# Altium PCB PCB.001.PcbDoc
Units mm, origin at the board's own origin, x right, y up, seen from the top; angles counter-clockwise.
Board outline 30 x 37.25 mm, 2 copper layers (Top Layer, Bottom Layer), stack 1.271 mm thick; 33 components, 28 nets, 154 pads, 51 vias.
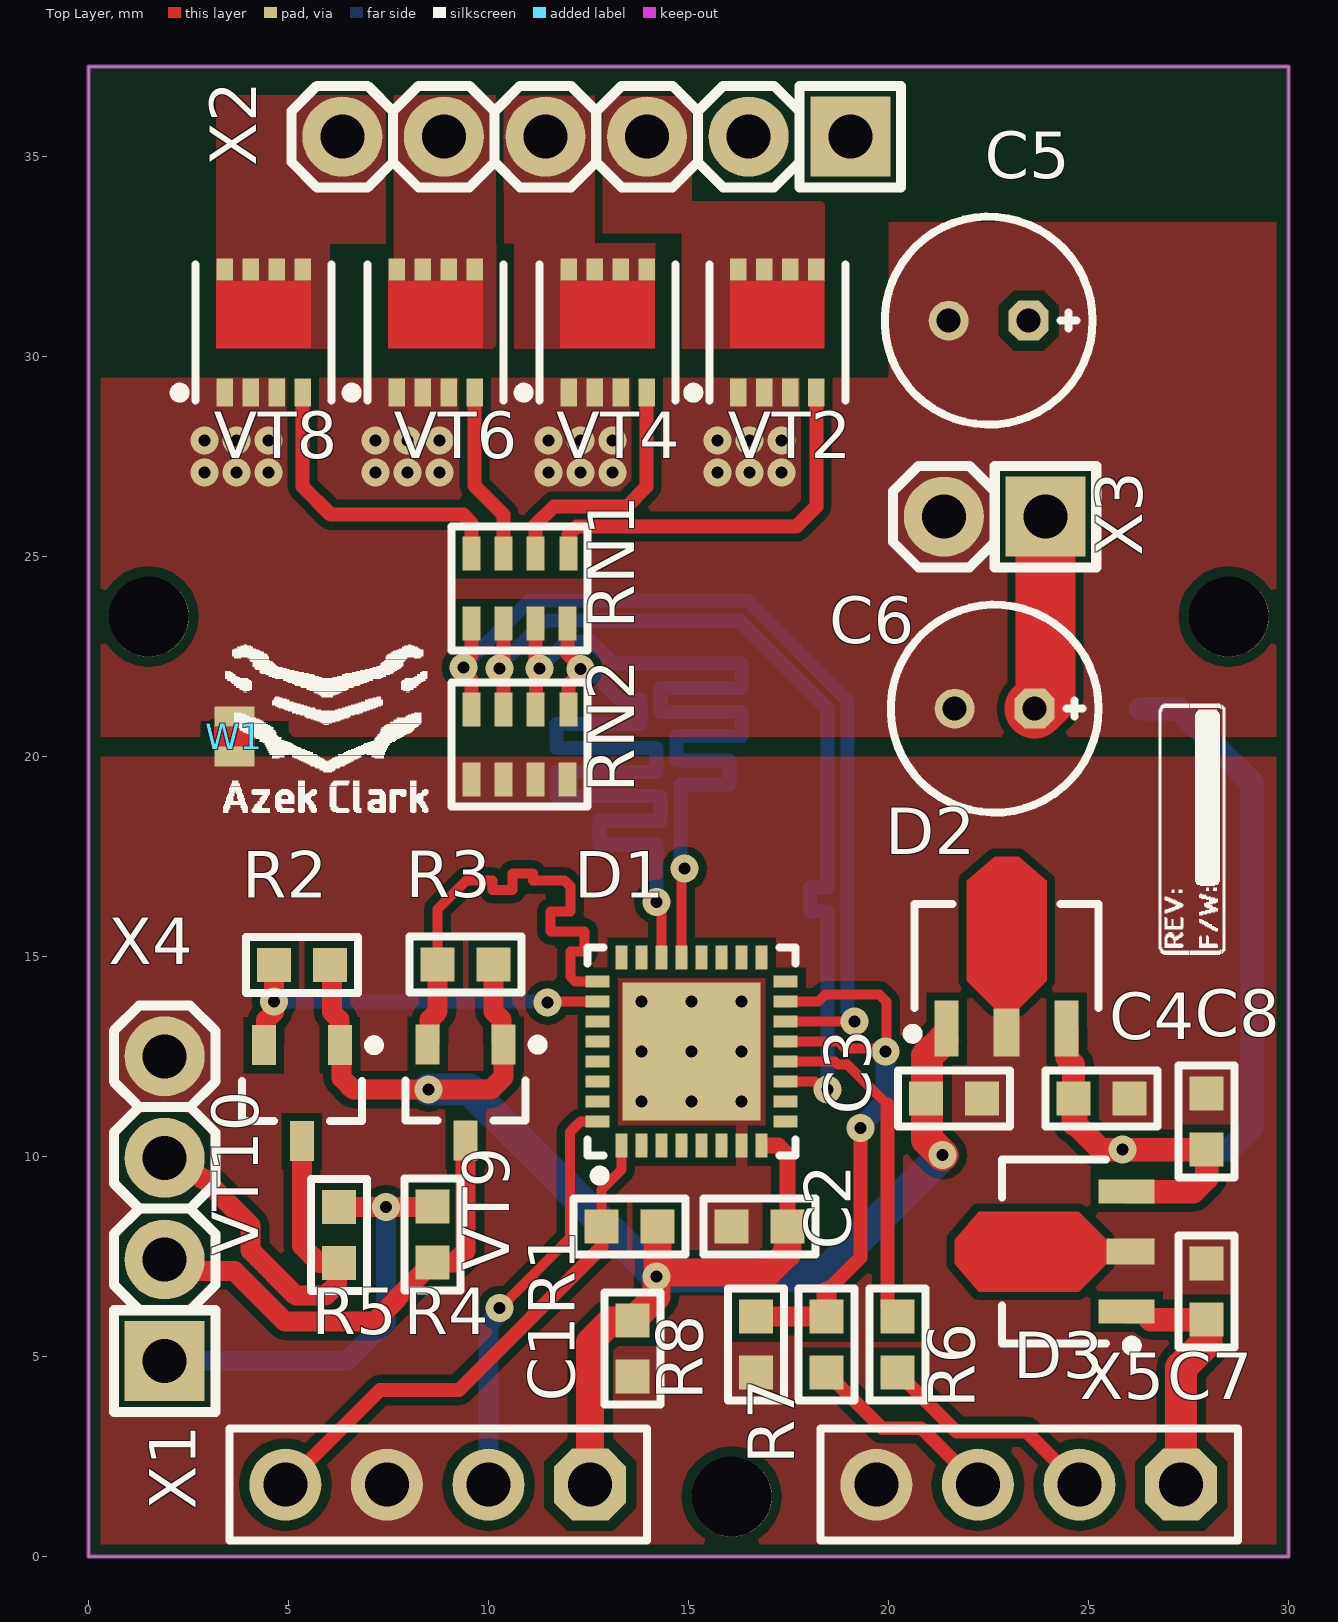
[diagram p0: Top Layer view]
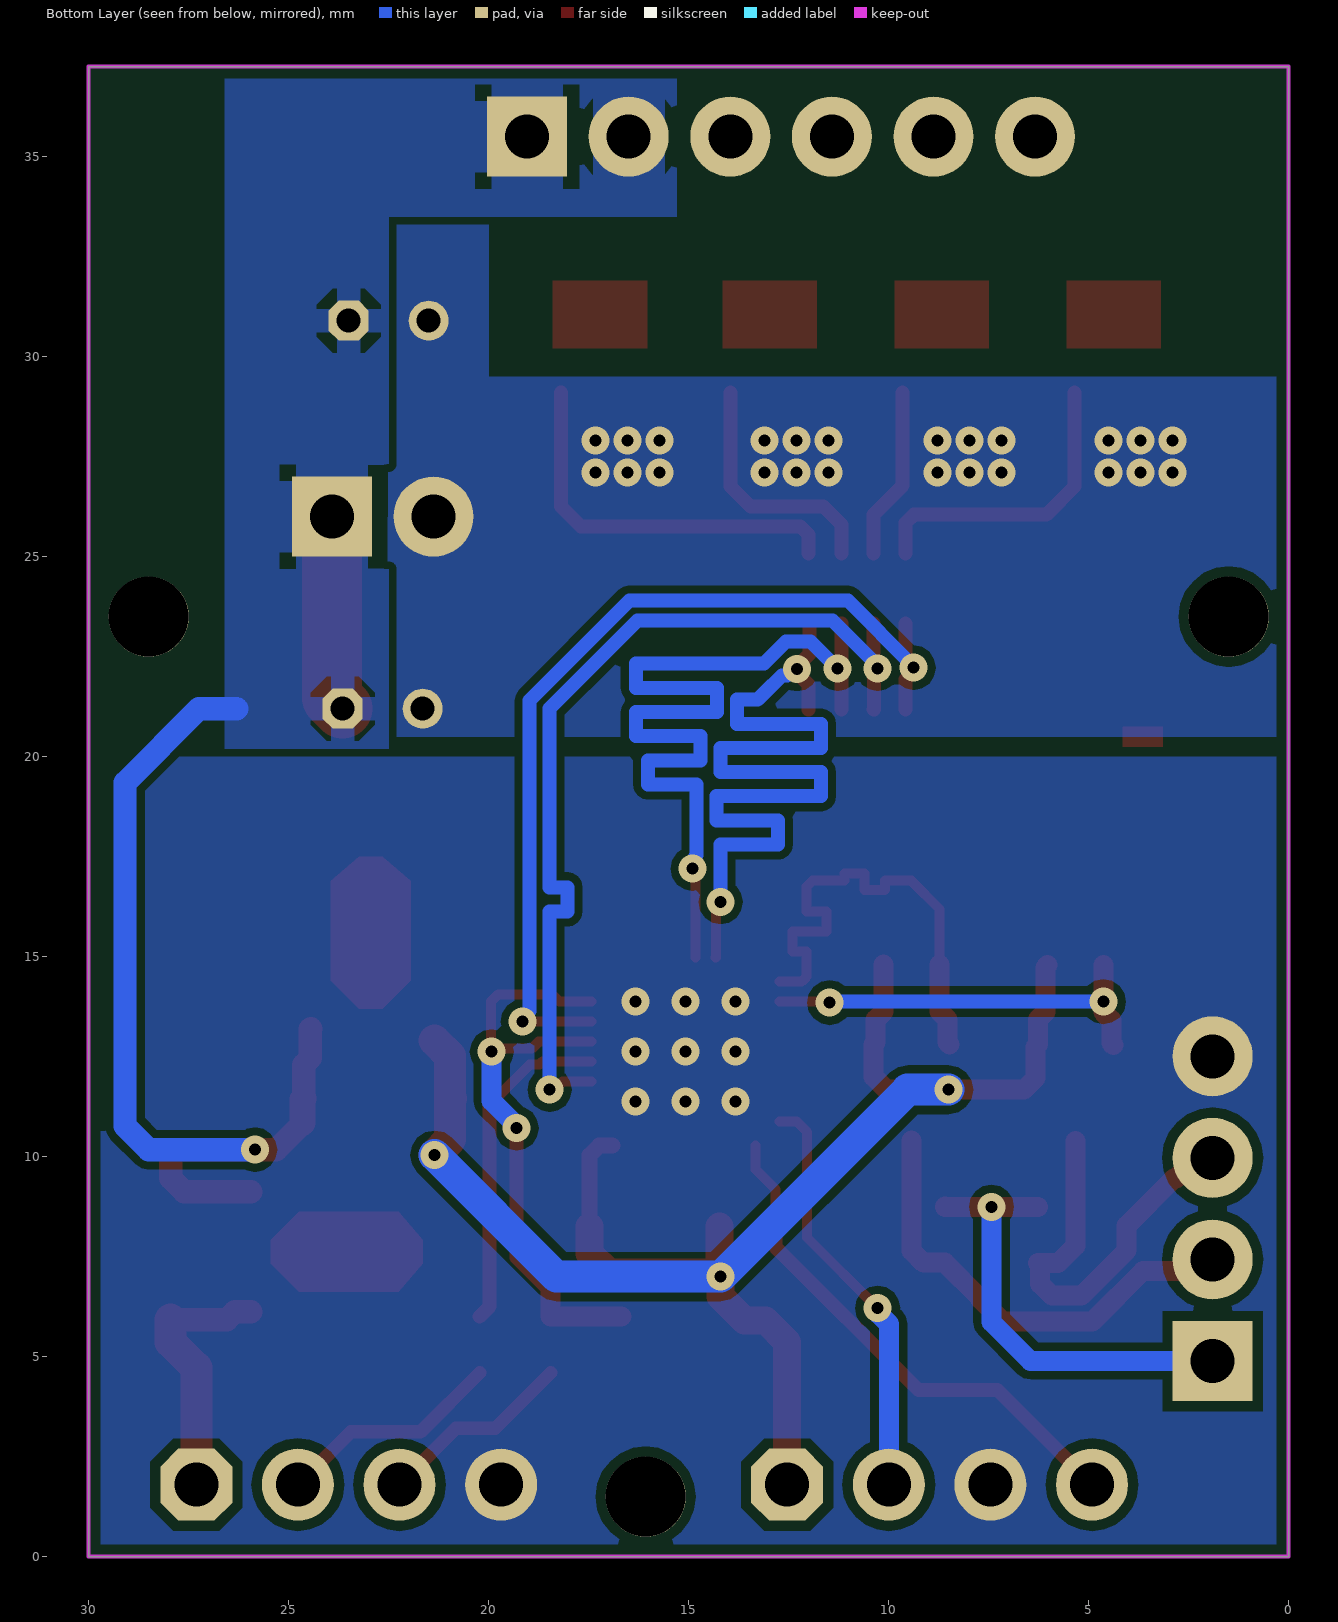
[diagram p1: Bottom Layer view, seen from below]
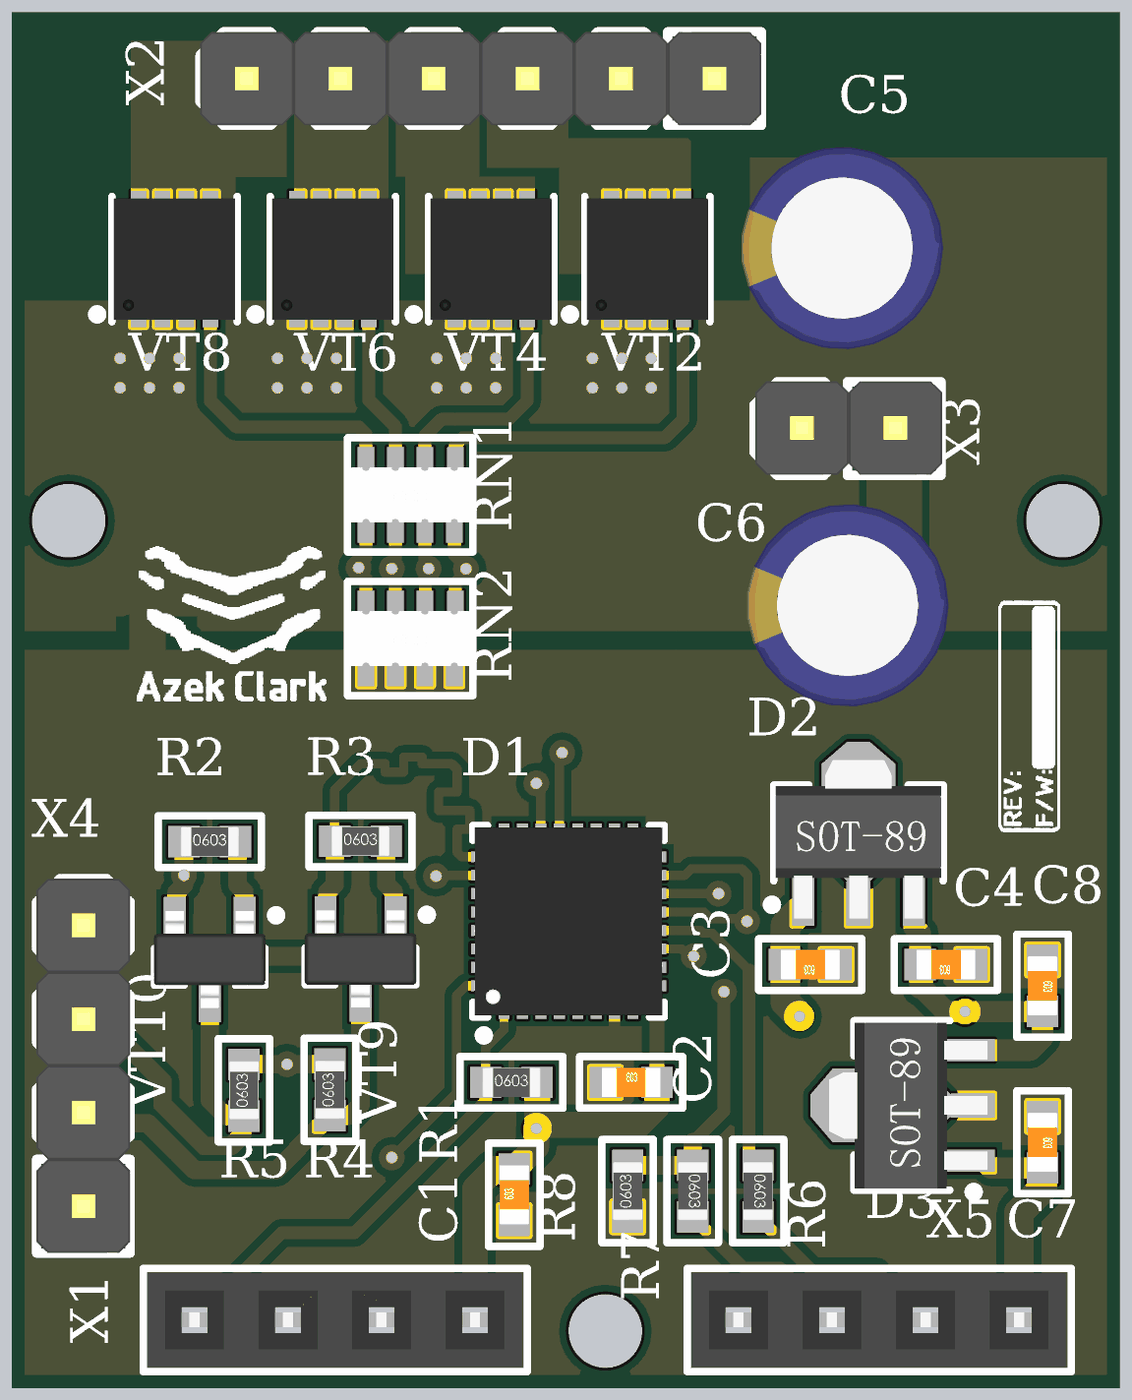
[diagram p2: 3D render of the assembled board from above, using the file's embedded part models]

## Layer stack, top to bottom
Top Solder: solder mask 0.0102, Solder Resist, Dk 3.5
Top Layer: signal copper 0.0356
Dielectric 1: dielectric 1.2, FR-4, Dk 4.8
Bottom Layer: signal copper 0.0356
Bottom Solder: solder mask 0.0102, Solder Resist, Dk 3.5

## Board outline
0,0 0,37.25 30,37.25 30,0

## Design rules (kind name [scope] priority, off if disabled: settings)
BoardOutlineClearance [All] p1: gap=0.3 ignorepadtopadclearanceinfootprint=FALSE
Clearance Clearance_1 [InNamedPolygon('12V_L02_P005')] p1: gap=0.2 ignorepadtopadclearanceinfootprint=FALSE except(0: Arc-Arc Arc-Track Arc-SMDPad Arc-THPad Arc-Via Arc-Fill Arc-Poly Arc-Region Arc-Text Arc-Hole Track-Track Track-SMDPad Track-THPad Track-Via Track-Fill Track-Poly Track-Region Track-Text Track-Hole SMDPad-Hole THPad-Hole Via-Hole Fill-Hole Poly-Hole Region-Hole Text-Hole)
Clearance Clearance_NPTH [All vs InPadClass('NPTH')] p2: gap=0.4 ignorepadtopadclearanceinfootprint=FALSE except(0: Arc-Hole Track-Hole SMDPad-Hole THPad-Hole Via-Hole Fill-Hole Poly-Hole Region-Hole Text-Hole)
Clearance Clearance_MultiLayerPad [OnLayer('Multi-Layer') and IsPad] p3: gap=0.25 ignorepadtopadclearanceinfootprint=FALSE except(0: Arc-Hole Track-Hole SMDPad-Hole THPad-Hole Via-Hole Fill-Hole Poly-Hole Region-Hole Text-Hole)
Clearance Clearance_Polygon [InPolygon] p4: gap=0.2 ignorepadtopadclearanceinfootprint=TRUE except(0: Arc-Hole Track-Hole SMDPad-Hole THPad-Hole Via-Hole Fill-Poly Fill-Hole Poly-Hole Region-Hole Text-Hole)
Clearance [All] p5: gap=0.15 ignorepadtopadclearanceinfootprint=TRUE except(0: Arc-Hole Track-Hole SMDPad-Fill SMDPad-Hole THPad-Hole Via-Hole Fill-Hole Poly-Hole Region-Hole Text-Hole)
DiffPairsRouting [All] p1: maxlimit=0.254 minlimit=0.2 mostfreqgap=0.254 toplayer_minwidth=0.2 toplayer_maxwidth=0.5 toplayer_prefwidth=0.3 bottomlayer_minwidth=0.2 bottomlayer_maxwidth=0.5 bottomlayer_prefwidth=0.3 maxuncoupledlength=12.7
Height [All] p1: minheight=0 maxheight=60 prefheight=12.7
HoleSize [All] p1: absolutevalues=TRUE maxlimit=5 minlimit=0.025 maxpercent=80.000 minpercent=20.000
HoleToHoleClearance [All] p1: gap=0.2 allowstackedmicrovias=TRUE
MatchedLengths MatchedLengths_RMII [InNetClass('RMII')] p1: tolerance=2.54 checknetsindiffpair=FALSE checkdiffpairvsdiffpair=TRUE checkxsignals=TRUE checkothers=TRUE
MinimumSolderMaskSliver [All] p1: minsoldermaskwidth=0.05
PlaneClearance [All] p1: clearance=0.5
PlaneConnect [All] p1: planeconnectstyle=Relief reliefexpansion=0.5 reliefentries=4 reliefconductorwidth=0.3 reliefairgap=0.2
PolygonConnect PolygonConnect_PowerPAD [All vs InPadClass('PowerPAD')] p1: connectstyle=Relief reliefconductorwidth=1 reliefentries=4 polygonreliefangle="90 Angle" airgapwidth=0.3
PolygonConnect PolygonConnect_PadGND [(InNet('GND') or InNet('PGND')) and IsPad] p2: connectstyle=Direct reliefconductorwidth=0.5 reliefentries=4 polygonreliefangle="90 Angle" airgapwidth=0.2
PolygonConnect PolygonConnect_Via [IsVia] p3: connectstyle=Direct reliefconductorwidth=0.254 reliefentries=4 polygonreliefangle="90 Angle" airgapwidth=0.254
PolygonConnect [All] p4: connectstyle=Relief reliefconductorwidth=0.6 reliefentries=4 polygonreliefangle="90 Angle" airgapwidth=0.3
RoomDefinition ultrasonic [InComponentClass('ultrasonic')] p1: confinementstyle=ConfineIn formatcopy=TRUE lockcomponents=FALSE outline 15.5,-0.25 29.25,-0.25 29.25,12.5 15.5,12.5
RoomDefinition Transistor [InComponentClass('Transistor')] p2: confinementstyle=ConfineIn formatcopy=TRUE lockcomponents=FALSE outline 0.55,18.3 25.65,18.3 25.65,37.2 0.55,37.2
RoomDefinition MCU [InComponentClass('MCU')] p3: confinementstyle=ConfineIn formatcopy=TRUE lockcomponents=FALSE outline 2.8,-0.1 27.1,-0.1 27.1,18 2.8,18
RoomDefinition "I2C Conventor" [InComponentClass('I2C Conventor')] p4: confinementstyle=ConfineIn formatcopy=TRUE lockcomponents=FALSE outline 0.2,3.2 11.8,3.2 11.8,15.9 0.2,15.9
RoutingVias [All] p1: holewidth=0.3 width=0.7 viastyle="Through Hole" minholewidth=0.3 minwidth=0.7 maxholewidth=0.5 maxwidth=1.2
SilkToSilkClearance [All] p1: silktosilkclearance=0
SilkToSolderMaskClearance [IsPad] p1: minsilkscreentomaskgap=0.05 clearancetoexposedcopper=TRUE
SolderMaskExpansion [All] p1: expansion=0.075 istentingtop=FALSE
Width [All] p1: maxlimit=10 minlimit=0.15 preferedwidth=0.15
21 further rules are at their usual default settings.

## Classes and differential pairs
component class ultrasonic: C7 C8 D3 R6 R7 R8 X5
component class Transistor: C5 C6 RN1 RN2 VT2 VT4 VT6 VT8 W1 X2 X3
component class MCU: C1 C2 C3 C4 D1 D2 R1 X1
component class "I2C Conventor": R2 R3 R4 R5 VT9 VT10 X4

## Components (designator, comment, footprint, x,y, rotation, side; value= is the part's Value field where it differs from the comment)
C1 "100nF" CH0603C 13.6,5.2 r90 top
C2 "100nF" CH0603C 16.775,8.25 r0 top
C3 "100nF" CH0603C 21.639,11.45 r180 top
C4 "100nF" CH0603C 25.324,11.45 r180 top
C5 "100uF" D5C2H11 22.5,30.9 r180 top
C6 "100uF" D5C2H11 22.65,21.2 r180 top
C7 "100nF" CH0603C 27.95,6.625 r270 top
C8 "100nF" CH0603C 27.95,10.875 r270 top
D1 "STM8L151KxU6" 32-UFQFPN 15.075,12.625 r90 top
D2 "L78L05ACUTR" SOT89_123 22.95,15 r90 top
D3 "L78L05ACUTR" SOT89_123 24.15,7.625 r180 top
R1 "10k" CH0603R 13.525,8.25 r0 top
R2 "1k5" CH0603R 5.333,14.786 r0 top
R3 "1k5" CH0603R 9.426,14.8 r0 top
R4 "10k" CH0603R 8.596,8.05 r90 top
R5 "10k" CH0603R 6.263,8.036 r90 top
R6 "100" CH0603R 20.223,5.3 r270 top
R7 "1K2" CH0603R 18.448,5.3 r270 top
R8 "2k2" CH0603R 16.681,5.3 r90 top
RN1 "47" "CH0603Rx4 (1206)" 10.775,24.2 r90 top
RN2 "1k5" "CH0603Rx4 (1206)" 10.775,20.3 r90 top
VT2 "DMG7430LFG-7" "TRANS: PowerDI®3333-8" 17.215,30.6 r180 top
VT4 "DMG7430LFG-7" "TRANS: PowerDI®3333-8" 12.975,30.6 r180 top
VT6 "DMG7430LFG-7" "TRANS: PowerDI®3333-8" 8.675,30.6 r180 top
VT8 "DMG7430LFG-7" "TRANS: PowerDI®3333-8" 4.375,30.6 r180 top
VT9 "2N7002" SOT23_123 9.426,11.6 r270 top
VT10 "2N7002" SOT23_123 5.333,11.586 r270 top
W1 "Net Tie" "CON: Net Tie" 3.642,20.5 r270 top net-tie
X1 "PBS-4" "CON: PBS-4" 8.726,1.8 r180 top
X2 "" "CON: PLS-6" 12.69,35.5 r180 top
X3 "PLS-2" "CON: PLS-2" 22.65,26 r180 top
X4 "" "CON: PLS-4" 1.9,8.7 r90 top
X5 "" "CON: PBS-4" 23.5,1.8 r180 top

## Footprints (in the part's own frame and the unit in brackets; to place one, negate y for a bottom-side part, rotate by r counter-clockwise, add the part's x,y. Pads: shape width x height; smd on the part's side, far side on the other; paste and mask are expansions set on the pad)
32-UFQFPN [mm] "32-lead, 5 x 5 mm, 0.5 mm pitch"
  rect 3.45x3.45 smd: 0(0,0)
  rect 0.6x0.3 smd: 1(-2.35,1.75) 2(-2.35,1.25) 3(-2.35,0.75) 4(-2.35,0.25) 5(-2.35,-0.25) 6(-2.35,-0.75) 7(-2.35,-1.25) 8(-2.35,-1.75) 17(2.35,-1.75) 18(2.35,-1.25) 19(2.35,-0.75) 20(2.35,-0.25) 21(2.35,0.25) 22(2.35,0.75) 23(2.35,1.25) 24(2.35,1.75)
  rect 0.3x0.6 smd: 9(-1.75,-2.35) 10(-1.25,-2.35) 11(-0.75,-2.35) 12(-0.25,-2.35) 13(0.25,-2.35) 14(0.75,-2.35) 15(1.25,-2.35) 16(1.75,-2.35) 25(1.75,2.35) 26(1.25,2.35) 27(0.75,2.35) 28(0.25,2.35) 29(-0.25,2.35) 30(-0.75,2.35) 31(-1.25,2.35) 32(-1.75,2.35)
  silkscreen extent -3.2,-2.6 2.6,2.6, body extent -2.56,-2.56 2.56,2.56, height 0.6
CH0603C [mm] "Chip Capacitor, 2-Leads, Body 1,53x0,85mm, IPC Medium Density"
  rect 0.85x0.85 smd: 1(-0.7,0) 2(0.7,0)
  silkscreen extent -1.4,-0.7 1.4,0.7, body extent -0.8,-0.4 0.8,0.4, height 0.3
CH0603R [mm]
  rect 0.85x0.85 smd: 1(-0.7,0) 2(0.7,0)
  silkscreen extent -1.4,-0.7 1.4,0.7, body extent -0.8,-0.4 0.8,0.4, height 0.44
"CH0603Rx4 (1206)" [mm] "Resistor assembly 0603x4, 0.5mm height"
  rect 0.85x0.45 smd: 1(-0.875,1.2) 2(-0.875,0.4) 3(-0.875,-0.4) 4(-0.875,-1.2) 5(0.875,-1.225) 6(0.875,-0.4) 7(0.875,0.4) 8(0.875,1.2)
  silkscreen extent -1.55,-1.7 1.55,1.7, body extent -0.75,-1.6 0.75,1.6, height 0.51
"CON: Net Tie" [mm] "GND's connection"
  rect 0.5x1 smd paste-1 mask+0.102: 1(-0.5,0) 2(0.5,0)
  Top Layer region: -0.25,0.5 0.25,0.5 0.25,-0.5 -0.25,-0.5
"CON: PBS-4" [mm] "PBS-5"
  oct 1.8x1.8 hole 1.1: 1(-3.81,0)
  round 1.8 hole 1.1: 2(-1.27,0) 3(1.27,0) 4(3.81,0)
  silkscreen extent -5.23,-1.4 5.2,1.4, body extent -5.08,-1.27 5.08,1.27, height 8.4
"CON: PLS-2" [mm]
  rect 2x2 hole 1.1: 1(-1.27,0)
  round 2 hole 1.1: 2(1.27,0)
  silkscreen extent -2.54,-1.27 2.54,1.27, body extent -2.57,-1.28 2.51,1.26, height 8.54
"CON: PLS-4" [mm] "PLS-40 4 pin header"
  rect 2x2 hole 1.1: 1(-3.81,0)
  round 2 hole 1.1: 2(-1.27,0) 3(1.27,0) 4(3.81,0)
  silkscreen extent -5.08,-1.27 5.08,1.27, body extent -5.08,-1.27 5.08,1.27, height 8.54
"CON: PLS-6" [mm]
  rect 2x2 hole 1.1: 1(-6.35,0)
  round 2 hole 1.1: 2(-3.81,0) 3(-1.27,0) 4(1.27,0) 5(3.81,0) 6(6.35,0)
  silkscreen extent -7.62,-1.27 7.62,1.27, body extent -7.62,-1.27 7.62,1.27, height 8.54
D5C2H11 [mm] "Polar capacitor, diameter 5 mm, leads clearance 2 mm, height 11 mm"
  oct 1x1 hole 0.6: 1(-1,0)
  round 1 hole 0.6: 2(1,0)
  silkscreen extent -2.6,-2.6 2.6,2.6, body extent -2.75,-2.75 2.75,2.75, height 13.5
SOT23_123 [mm] "SOT23, 3-Leads, Body 3,0x2,6mm (max), Pitch 0,95mm, IPC Medium Density"
  rect 1x0.6 smd: 1(-1.2,0.95) 2(1.2,0) 3(-1.2,-0.95)
  round 0.5 on Mech1: ""(-0.9,1.1)
  silkscreen extent -1.32,-1.5 0.7,1.92, body extent -1.32,-1.52 1.32,1.52, height 1.12
SOT89_123 [mm] "SOT89, 3-Leads, Body 4,50x2,45mm, Pitch 1,50mm, Lead Span 4,1mm, IPC Medium Density"
  rect 1.4x0.6 smd: 1(-1.8,1.5) 3(-1.8,-1.5)
  rect 1.2x0.65 smd: 2(-1.9,0)
  round 0.5 on Mech1: ""(-1.8,1.8)
  Top Layer region: -1.3,0.3 -0.6,1 1.9,1 2.5,0.3 2.5,-0.3 1.9,-1 -0.6,-1 -1.3,-0.3
  silkscreen extent -2.05,-2.3 1.32,2.47, body extent -2.3,-2.25 2,2.25, height 1.51
"TRANS: PowerDI®3333-8" [mm] "8 leads, 0.65mm pitch, 3.3mm x 3.3mm body"
  rect 0.42x0.7 smd: 1(-0.975,1.5) 3(-0.325,1.5) 3(0.325,1.5) 3(0.975,1.5)
  rect 0.42x0.54 smd: 2(-0.975,-1.58) 2(-0.325,-1.58) 2(0.325,-1.58) 2(0.975,-1.58)
  Top Layer region: 1.186,0.4 -1.184,0.4 -1.184,-1.31 1.186,-1.31
  silkscreen extent -1.7,-1.7 2.2,1.7, body extent -1.65,-1.65 1.65,1.65, height 0.85

## Part data
C1 C2 C3 C4 C7 C8: library part Capacitor
C5 C6: library part AlumCap
D1: "STM8", Manufacturer="ST Microelectronics", ComponentKind=UFQFPN28, HelpURL=https://ru.mouser.com/datasheet/2/389/stm8l151c4-956418.pdf, Model=STM8L151GxU6
D2 D3: library part L78LxxACUTR, "Step-down", Manufacturer="ST Microelectronics", ComponentKind="SOT-89, 100mA", HelpURL=https://www.st.com/resource/en/datasheet/l78l.pdf, Model=L78L05ACUTR
R1 R2 R3 R4 R5 R6 R7 R8: library part Resistor
RN1 RN2: library part "Resistor assembly", Manufacturer="Bourns GmbH.", HelpURL=https://www.terraelectronica.ru/pdf/show?pdf_file=https%253A%252F%252Fwww.mouser.com%252Fds%252F2%252F54%252FATCAY-777361.pdf, Model=CAT16-J4
VT2 VT4 VT6 VT8: library part N-chanel, "Mosfet", Manufacturer="Diodes Incorporated", ComponentKind="30V, 10A", HelpURL=https://www.diodes.com/assets/Datasheets/DMG7430LFG.pdf, Model=DMG7430LFG-7
VT9 VT10: library part N-chanel, "Mosfet", Manufacturer="ON Semiconductor", ComponentKind="0.2А, 60В", HelpURL=https://static.chipdip.ru/lib/318/DOC000318735.pdf, Model=2N7002
X1 X4 X5: library part 4-Connector
  X1: Model=PBS-4
X2: library part 6-Connector
X3: library part 2-Connector, Model=PLS-2

## Free pads (board coordinates)
  round 2 hole 2 unplated paste+0: 0(1.5,23.5) 0(16.075,1.5) 0(28.5,23.5)

## Via types
v1: diameter 0.7, hole 0.3, Top Layer to Bottom Layer, tented both sides, 38 vias
v2: diameter 0.7, hole 0.3, Top Layer to Bottom Layer, tented bottom, 9 vias
v3: diameter 0.7, hole 0.3, Top Layer to Bottom Layer, 4 vias

## Nets (pads, with @x,y where several pads share a name; then routed paths per layer and width w, separated by ;. In a path a pad name is that pad's centre, name@x,y a point inside that pad or via, vN(x,y) a via of type N, cw(c..) or ccw(c..) an arc to the next point about the centre after c; other vN are vias at no path point)
3V3: C1.2 C2.2 C3.2 D1.8 D2.1 R1.2 R2.2 R3.2 VT9.1 VT10.1 X1.1 | length 43.3
  Top Layer w0.4: D1.8@16.9,10.275 17.241,10.275 17.475,10.041 C2.2
  Top Layer w0.5: R2.2 6.084,14.735 6.084,13.611 6.27,13.425 6.27,12.799 VT10.1 6.325,12.744 6.325,11.968 6.618,11.675 v3(8.5,11.675) 10.055,11.675 10.376,11.996 VT9.1 10.326,12.85 10.326,13.425 10.126,13.625 R3.2
  Top Layer w0.7: X1.1 12.536,5.363 13.073,5.9 C1.2 14.2,6.5 v3(14.2,7) ; R1.2 14.225,7.1 16.99,7.1 17.475,7.585 C2.2
  Top Layer w0.8: v3(21.35,10.041) 20.964,10.426 20.964,11.425 C3.2 20.964,11.475 20.964,12.514 D2.1@21.35,12.9
  Bottom Layer w0.8: v3(8.5,11.675) 9.525,11.675 v3(14.2,7) 18.309,7 v3(21.35,10.041)
5V: C7.2 D3.1 X5.1 | length 6.5
  Top Layer w0.58: D3.1 26.35,6.125 26.55,5.925 C7.2
  Top Layer w0.8: X5.1 27.31,4.723 27.95,5.363 C7.2
12V: C4.2 C5.1 C6.1 C8.2 D2.3 D3.3 X2.1 X2.2 X3.1 | length 29.4
  Top Layer w0.58: D2.3 24.46,13.19 24.46,12.464 24.624,12.3 C4.2 ; 24.649,10.837 25.311,10.175 v3(25.84,10.175) C8.2 27.95,9.46 27.615,9.125 D3.3
  Top Layer w0.65: C4.2 24.649,11.425 24.649,10.837
  Top Layer w1.5: C6.1 23.92,21.47 X3.1
  Bottom Layer w0.58: v3(25.84,10.175) 28.5,10.175 29.09,10.765 29.09,19.353 27.243,21.2 26.3,21.2
GND: C1.1 C2.1 C3.1 C4.1 C7.1 C8.1 D1.0 D1.7 D2.2 D3.2 R8.1 RN2.1 RN2.2 RN2.3 RN2.4 W1.2 X1.3 X4.4 X5.4
  other v2: 13.825,11.375 15.075,11.375 16.325,11.375 13.825,12.625 15.075,12.625 16.325,12.625 13.825,13.875 15.075,13.875 16.325,13.875
"I2C SCL": D1.26 R2.1 VT10.3 | length 10.2
  Top Layer w0.25: v1(11.476,13.851) 11.5,13.875 D1.26
  Top Layer w0.5: VT10.3 4.433,12.836 4.433,13.411 4.633,13.611 v1(4.633,13.875) R2.1
  Bottom Layer w0.25: v1@11.451,13.875 v1(11.476,13.851)
  Bottom Layer w0.35: v1(4.633,13.875) v1@11.451,13.875
"I2C SDA": D1.25 R3.1 VT9.3 | length 12.7
  Top Layer w0.25: R3.1 8.726,16.193 9.434,16.9 9.465,16.9 10.094,16.9 10.094,16.673 10.598,16.673 10.598,17.081 11.102,17.081 11.102,16.9 11.879,16.9 11.902,16.9 12.04,16.762 12.048,16.754 12.048,16.133 11.55,16.133 11.55,15.629 12.399,15.629 12.399,15.125 12.048,15.125 12.048,14.735 12.048,14.5 12.173,14.375 D1.25
  Top Layer w0.5: VT9.3 8.526,12.85 8.526,13.425 8.726,13.625 R3.1
"LED BLUE": D1.22 RN1.4 RN2.5 | length 23.4
  Top Layer w0.25: v1(14.2,16.369) 14.321,16.247 14.321,14.979 D1.22
  Top Layer w0.35: RN1.4 11.975,22.567 12.29,22.251 v1(12.29,22.192) ; RN2.5 12,21.807 12.298,22.105 v1@12.298,22.2
  Bottom Layer w0.35: v1(12.29,22.192) 12.385,22.192 12.545,22.032 12.668,22.032 13.098,21.602 13.273,21.427 13.79,21.427 13.79,20.823 11.69,20.823 11.69,20.219 14.2,20.219 14.2,19.615 11.69,19.615 11.69,19.011 14.3,19.011 14.3,18.407 12.766,18.407 12.766,17.803 14.2,17.803 14.2,17.442 14.2,17.267 v1(14.2,16.369)
"LED GREEN": D1.21 RN1.3 RN2.6 | length 23.4
  Top Layer w0.25: D1.21 14.825,17.125 v1(14.9,17.2)
  Top Layer w0.35: RN2.6 11.182,21.182 11.182,22.013 11.275,22.105 v1(11.275,22.2) 11.275,22.295 11.175,22.395 RN1.3
  Bottom Layer w0.35: v1(11.275,22.2) 11.95,22.875 12.562,22.875 12.937,22.5 13.112,22.325 16.322,22.325 16.322,21.721 14.29,21.721 14.29,21.117 16.322,21.117 16.322,20.513 14.7,20.513 14.7,19.909 16.016,19.909 16.016,19.305 14.8,19.305 14.8,17.566 14.8,17.547 14.833,17.514 14.833,17.267 v1(14.9,17.2)
"LED RED": D1.11 RN1.2 RN2.7 | length 23.4
  Top Layer w0.25: D1.11 18.153,11.875 18.353,11.675 v1(18.475,11.675)
  Top Layer w0.35: RN2.7 10.368,21.182 10.368,22.013 10.275,22.105 v1(10.275,22.2) 10.275,22.295 10.375,22.395 RN1.2
  Bottom Layer w0.35: v1(10.275,22.2) 10.275,22.275 11.399,23.399 16.277,23.399 18.475,21.201 18.475,17.514 18.475,16.735 18.032,16.735 18.032,16.131 18.475,16.131 18.475,15.1 v1(18.475,11.675)
"LED WHITE": D1.14 RN1.1 RN2.8 | length 23.5
  Top Layer w0.25: D1.14 v1(19.15,13.375)
  Top Layer w0.35: RN2.8 9.575,21.93 9.375,22.13 v1(9.375,22.225) 9.375,22.32 9.575,22.52 RN1.1
  Bottom Layer w0.35: v1(9.375,22.225) 9.375,22.255 11.019,23.899 16.484,23.899 18.975,21.408 18.975,13.645 19.15,13.47 v1(19.15,13.375)
"MCU NRST": D1.1 R1.1 X1.4 | length 13.1
  Top Layer w0.25: R1.1 12.825,9.179 13.325,9.679 D1.1
  Top Layer w0.35: X1.4 7.28,4.164 9.253,4.164 12.825,7.736 R1.1
"MCU SWIM": D1.32 X1.2 | length 10.5
  Top Layer w0.25: v1(10.275,6.212) 12.038,7.976 12.038,10.623 12.29,10.875 D1.32
  Bottom Layer w0.5: X1.2 9.996,5.82 10.237,6.06 10.237,6.174 v1(10.275,6.212)
NetR4_1: R4.1 VT9.2 X4.2 | length 11.7
  Top Layer w0.5: X4.2 2.187,7.143 3.642,7.143 4.91,5.875 7.148,5.875 7.714,6.441 7.714,6.468 R4.1 9.134,7.35 9.426,7.643 VT9.2
NetR5_1: R5.1 VT10.2 X4.3 | length 10.5
  Top Layer w0.5: X4.3 2.306,9.97 2.816,9.46 2.865,9.46 4.05,8.275 4.05,7.655 5.18,6.525 5.918,6.525 6.211,6.818 6.211,7.284 R5.1 5.766,7.336 5.333,7.769 VT10.2
NetR6_2: R6.2 X5.2 | length 5.7
  Top Layer w0.34: R6.2 21.703,3.12 23.45,3.12 X5.2
NetR7_2: R7.2 X5.3 | length 4.9
  Top Layer w0.34: R7.2 19.836,3.212 20.818,3.212 X5.3
NetRN1_5: RN1.5 VT2.1 | length 9.8
  Top Layer w0.35: RN1.5 12,25.549 12.205,25.754 17.69,25.754 18.19,26.254 VT2.1
NetRN1_6: RN1.6 VT4.1 | length 6.2
  Top Layer w0.35: RN1.6 11.175,25.8 11.629,26.254 13.453,26.254 13.95,26.751 VT4.1
NetRN1_7: RN1.7 VT6.1 | length 4.3
  Top Layer w0.35: VT6.1 9.65,26.773 10.375,26.048 RN1.7
NetRN1_8: RN1.8 VT8.1 | length 7.7
  Top Layer w0.35: VT8.1 5.35,26.751 6.052,26.048 9.37,26.048 9.575,25.843 RN1.8
NetVT2_2: VT2.2 X2.3
NetVT4_2: VT4.2 X2.4
NetVT6_2: VT6.2 X2.5
NetVT8_2: VT8.2 X2.6
PGND: C5.2 C6.2 VT2.3 VT4.3 VT6.3 VT8.3 W1.1 X3.2
  other v1: 2.898,27.106 3.698,27.106 4.498,27.106 7.173,27.106 7.973,27.106 8.773,27.106 11.498,27.106 12.298,27.106 13.098,27.106 15.723,27.106 16.523,27.106 17.323,27.106 2.898,27.906 3.698,27.906 4.498,27.906 7.173,27.906 7.973,27.906 8.773,27.906 11.498,27.906 12.298,27.906 13.098,27.906 15.723,27.906 16.523,27.906 17.323,27.906
"US ECHO": D1.13 D1.15 R7.1 R8.2 | length 15.1
  Top Layer w0.25: D1.13 18.75,12.875 18.925,12.7 v1@19.801,12.7 ; D1.15 18.232,13.875 18.407,14.05 19.773,14.05 19.948,13.875 v1@19.948,12.846
  Top Layer w0.35: 18.448,6.625 19.298,7.475 v1(19.298,10.711)
  Top Layer w0.5: R8.2 R7.1 18.448,6.625
  Bottom Layer w0.5: v1(19.298,10.711) 19.298,10.765 19.923,11.39 v1(19.923,12.625)
"US TRIG": D1.12 R6.1 | length 8.4
  Top Layer w0.25: D1.12 18.659,12.375 18.734,12.3 18.973,12.3 19.973,11.3
  Top Layer w0.35: 19.973,11.3 19.973,6.25 R6.1
VIN: R4.2 R5.2 X4.1 | length 11.1
  Top Layer w0.5: R5.2 6.27,8.743 v1(7.43,8.743) 8.589,8.743 R4.2
  Bottom Layer w0.5: X4.1 6.453,4.89 7.43,5.867 v1(7.43,8.743)
pads on no net: D1.2 D1.3 D1.4 D1.5 D1.6 D1.9 D1.10 D1.16 D1.17 D1.18 D1.19 D1.20 D1.23 D1.24 D1.27 D1.28 D1.29 D1.30 D1.31 D2. D3. VT9. VT10.

## Polygon pours and split planes (outlines as drawn)
PGND on Top Layer "PGND_L01_P009" (solid, pour order 9): 0,29.475 20.007,29.475 20.007,33.366 29.994,33.366 30,20.5 4.968,20.5 4.997,20.529 4.997,20.9 2.792,20.9 2.792,20.5 0,20.5
GND on Top Layer "GND_L01_P006" (solid, remove dead copper, pour order 6): 30,20 0,20 0,0 30,0
NetVT2_2 on Top Layer "NETVT2_2_L01_P004" (solid, pour order 4): 12.65,36.519 12.65,33.114 12.681,33.083 14.825,33.083 14.825,30.2 18.399,30.2 18.399,33.815 18.327,33.887 15.075,33.887 15.075,36.506
NetVT4_2 on Top Layer "NETVT4_2_L01_P003" (solid, pour order 3): 10.175,36.519 10.187,36.506 10.187,32.834 10.637,32.834 10.645,30.2 14.159,30.2 14.159,32.834 12.65,32.834 12.65,36.519
NetVT8_2 on Top Layer "NETVT8_2_L01_P002" (solid, pour order 2): 3.189,30.2 3.189,36.531 7.625,36.531 7.625,32.834 7.616,32.826 6.033,32.826 6.033,30.2
NetVT6_2 on Top Layer "NETVT6_2_L01_P001" (solid, pour order 1): 10.175,36.519 10.162,36.531 7.625,36.531 7.625,30.2 10.187,30.2
PGND on Top Layer "PGND_L01_P000" (solid, pour order 0): 2.425,29.475 17.925,29.475 17.95,29.45 17.95,26 2.425,26
PGND on Bottom Layer "PGND_L02_P010" (solid, pour order 10): 22.53,20.5 0,20.5 0,29.5 20,29.5 20,33.3 22.5,33.3
GND on Bottom Layer "GND_L02_P007" (solid, remove dead copper, pour order 7): 0,20 0,0 30,0 30,20
12V on Bottom Layer "12V_L02_P005" (solid, pour order 5): 15.3,37 15.3,33.5 22.5,33.5 22.5,20.2 26.6,20.2 26.6,37

## Keep-outs
Keep-Out Layer:
  the board outline again, w0.1

## Silkscreen, mask and mechanical layers (free items; w line width, h text height)
Top Overlay:
  drawing of 933 lines, arcs and shapes, not listed
Board Shape:
  the board outline again, w0.1